# EAGLE board TwixBC (EAGLE 5.06)
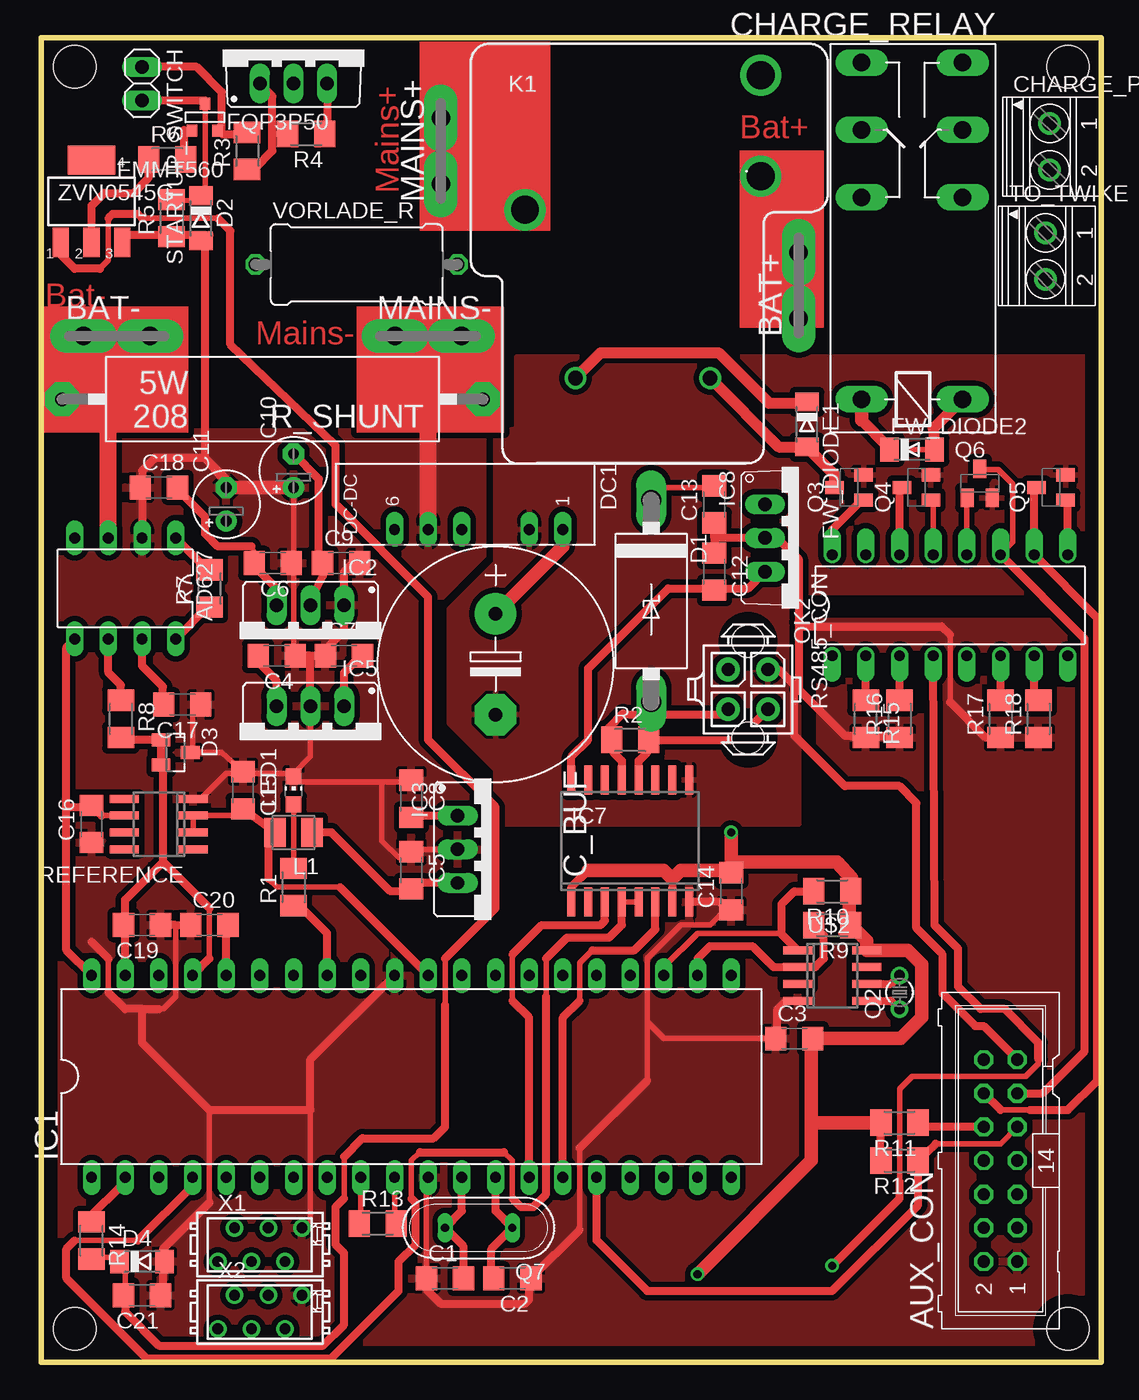
[diagram p0: board, top side]
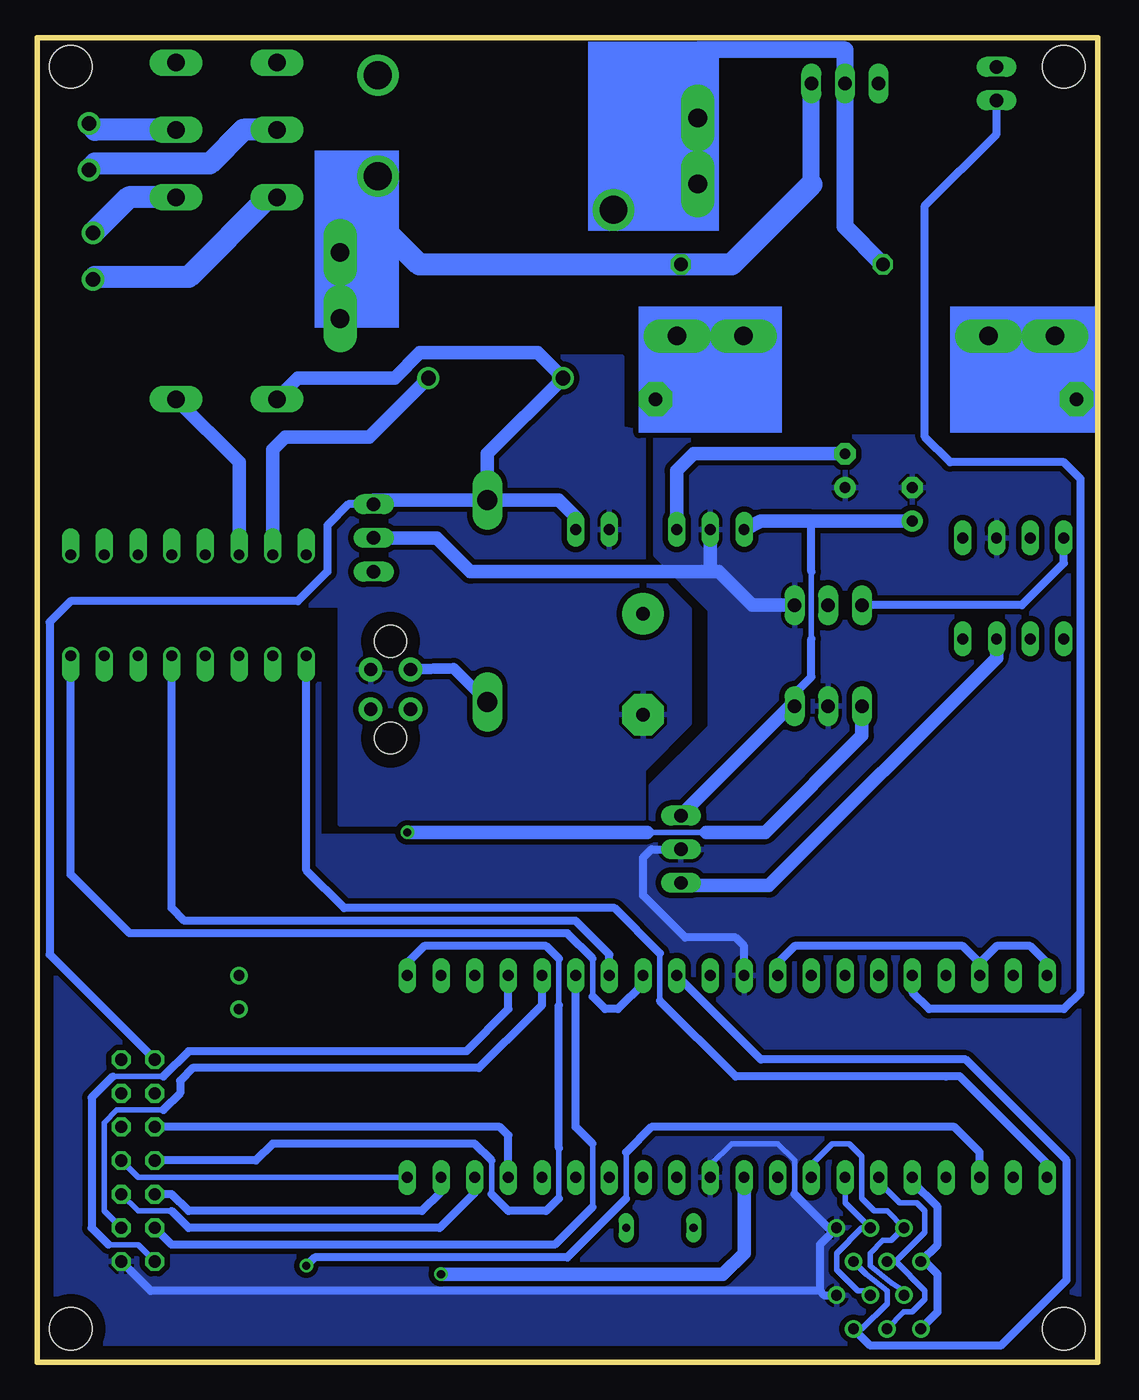
[diagram p1: board, bottom side, seen from below]

Size 80 x 100 mm. Coordinates in mm from the lower left corner, seen from the top.
Outline: 0,0 80,0 80,100 0,100 0,0
Copper layers (1*16): Top 0.035mm / dielectric 1.5mm / Bottom 0.035mm
Design rules "default *": minimum track width 10mil, minimum drill 24mil, track to track 16mil, track to pad 16mil, pad to pad 16mil, via to via 16mil, smd to smd 16mil, copper to edge 40mil, drill to drill 8mil, minimum pad ring 10mil, minimum via ring 8mil, stop-mask expansion 4mil, vias tented up to drill 0mil, thermal gap 10mil
Holes 3.2 mm at 2.54,2.54 2.54,97.79 77.47,97.79 77.47,2.54

## Footprints (pad centres in the part's own frame; a part is rotated, then mirrored left to right if it is on the bottom)
DIL08 = drill 0.813 long: 1 -3.81,-3.81; 2 -1.27,-3.81; 3 1.27,-3.81; 4 3.81,-3.81; 5 3.81,3.81; 6 1.27,3.81; 7 -1.27,3.81; 8 -3.81,3.81
ML14 = drill 0.914 octagon: 1 -7.62,-1.27; 2 -7.62,1.27; 3 -5.08,-1.27; 4 -5.08,1.27; 5 -2.54,-1.27; 6 -2.54,1.27; 7 0,-1.27; 8 0,1.27; 9 2.54,-1.27; 10 2.54,1.27; 11 5.08,-1.27; 12 5.08,1.27; 13 7.62,-1.27; 14 7.62,1.27
F061.100 = drill 1.4 pad 2.54 long: A1 -2.5,0; A2 2.5,0
C1206 = smd 1.6 x 1.8: 1 -1.4,0; 2 1.4,0
E2,5-5 = drill 0.813 pad 1.6 round: + -1.27,0 | drill 0.813 pad 1.6 octagon: - 1.27,0
E7,5-18 = drill 1.016 pad 3.15 round: + -3.81,0 | drill 1.016 pad 3.15 octagon: - 3.81,0
1751248 = drill 1.1 pad 1.7 round: 1 -1.75,-0.1; 2 1.75,-0.1
F4052 = drill 1.321 long: 1 -3.81,3.81; 2 -3.81,-3.81; O1 11.43,-3.81; O2 11.43,3.81; P1 16.51,-3.81; P2 16.51,3.81; S1 21.59,-3.81; S2 21.59,3.81
C4111-15 = drill 1.499 long: A 7.62,0; C -7.62,0
SOD80C = smd 1.4 x 1.8: A 1.7,0; C -1.7,0
SOT23 = smd 1 x 1.4: 1 -0.95,-1.1; 2 0.95,-1.1; 3 0,1.1
NMA = drill 0.813 long: 1 0,6.35; 2 0,3.81; 4 0,-1.27; 5 0,-3.81; 6 0,-6.35
SOT-23 = smd 0.787 x 0.889: 1 0.025,-1.016; 2 -0.94,1.016; 3 0.991,1.016
TO220BV = drill 1.016 long: D 0,-2.54; G -2.54,-2.54; S 2.54,-2.54
MINIMELF = smd 1.4 x 1.8: A 1.7,0; C -1.7,0
DIL40 = drill 0.813 long: 1 -24.13,-7.62; 2 -21.59,-7.62; 3 -19.05,-7.62; 4 -16.51,-7.62; 5 -13.97,-7.62; 6 -11.43,-7.62; 7 -8.89,-7.62; 8 -6.35,-7.62; 9 -3.81,-7.62; 10 -1.27,-7.62; 11 1.27,-7.62; 12 3.81,-7.62; 13 6.35,-7.62; 14 8.89,-7.62; 15 11.43,-7.62; 16 13.97,-7.62; 17 16.51,-7.62; 18 19.05,-7.62; 19 21.59,-7.62; 20 24.13,-7.62; 21 24.13,7.62; 22 21.59,7.62; 23 19.05,7.62; 24 16.51,7.62; 25 13.97,7.62; 26 11.43,7.62; 27 8.89,7.62; 28 6.35,7.62; 29 3.81,7.62; 30 1.27,7.62; 31 -1.27,7.62; 32 -3.81,7.62; 33 -6.35,7.62; 34 -8.89,7.62; 35 -11.43,7.62; 36 -13.97,7.62; 37 -16.51,7.62; 38 -19.05,7.62; 39 -21.59,7.62; 40 -24.13,7.62
79XXS = drill 1.016 long: GND -2.54,-2.54; IN 0,-2.54; OUT 2.54,-2.54
78XXS = drill 1.016 long: GND 0,-2.54; IN -2.54,-2.54; OUT 2.54,-2.54
SO16W = smd 0.6 x 2.2: 1 -4.445,-4.6; 2 -3.175,-4.6; 3 -1.905,-4.6; 4 -0.635,-4.6; 5 0.635,-4.6; 6 1.905,-4.6; 7 3.175,-4.6; 8 4.445,-4.6; 9 4.445,4.6; 10 3.175,4.6; 11 1.905,4.6; 12 0.635,4.6; 13 -0.635,4.6; 14 -1.905,4.6; 15 -3.175,4.6; 16 -4.445,4.6
TO220V = drill 1.016 long: 1 -2.54,-2.54; 2 0,-2.54; 3 2.54,-2.54
JT-PCB = drill 1.1 round: 1 5.08,0; 2 -5.08,0 | drill 2.1 round: C -8.89,12.7; NC 8.89,22.86; NO 8.89,15.24
L3225M = smd 1.6 x 2.2: 1 -1.4,0; 2 1.4,0
CHIP-LED0805 = smd 1.2 x 1.2: A 0,-1.05; C 0,1.05
DIL16 = drill 0.813 offset: 1 -8.89,-3.81; 2 -6.35,-3.81; 3 -3.81,-3.81; 4 -1.27,-3.81; 5 1.27,-3.81; 6 3.81,-3.81; 7 6.35,-3.81; 8 8.89,-3.81; 9 8.89,3.81; 10 6.35,3.81; 11 3.81,3.81; 12 1.27,3.81; 13 -1.27,3.81; 14 -3.81,3.81; 15 -6.35,3.81; 16 -8.89,3.81
TC26V = drill 0.813 round: 1 -1.27,0; 2 1.27,0
SOT23-BEC = smd 1 x 1.4: B -0.95,-1.1; C 0,1.1; E 0.95,-1.1
QS = drill 0.61 long: 1 -2.54,0; 2 2.54,0
M1206 = smd 1.6 x 2: 1 -1.4,0; 2 1.4,0
KH208-8 = drill 1.016 pad 2.54 octagon: 1 -15.875,0; 2 15.875,0
SO08 = smd 0.6 x 2.2: 1 -1.905,-2.6; 2 -0.635,-2.6; 3 0.635,-2.6; 4 1.905,-2.6; 5 1.905,2.6; 6 0.635,2.6; 7 -0.635,2.6; 8 -1.905,2.6
794681-4 = drill 1 pad 1.778 round: 1 1.5,-1.5; 2 1.5,1.5; 3 -1.5,-1.5; 4 -1.5,1.5 | hole 2.4: 3.63,0; -3.67,0
1X02 = drill 1.016 long: 1 -1.27,0; 2 1.27,0
S08 = smd 0.6 x 2.2: 1 0.635,1.21; 2 1.905,1.21; 3 3.175,1.21; 4 4.445,1.21; 5 4.445,6.41; 6 3.175,6.41; 7 1.905,6.41; 8 0.635,6.41
RDH/15 = drill 1.016 octagon: 1 -7.62,0; 2 7.62,0
MICROMATCH-6 = drill 0.813 round: 1 3.175,1.27; 2 1.905,-1.27; 3 0.635,1.27; 4 -0.635,-1.27; 5 -1.905,1.27; 6 -3.175,-1.27
SOT223 = smd 1.219 x 2.235: 1 -2.311,-3.099; 2 0,-3.099; 3 2.311,-3.099 | smd 3.6 x 2.2: 4 0,3.099

## Placement (x,y rotation side)
AD627  AD627  [DIL08]  6.35,58.42 180 top
AUX_CON  [ML14]  72.39,15.24 90 top
BAT+  PIN2F061.100  [F061.100]  57.15,81.28 90 top
BAT-  PIN2F061.100  [F061.100]  5.71,77.47 0 top
C1  18p  [C1206]  30.48,6.35 0 top
C2  18p  [C1206]  35.56,6.35 180 top
C3  100n  [C1206]  56.83,24.45 0 top
C4  100n  [C1206]  17.78,53.34 180 top
C5  100n  [C1206]  27.94,37.15 270 top
C6  100n  [C1206]  17.48,60.33 180 top
C7  100n  [C1206]  22.86,53.34 0 top
C8  100n  [C1206]  27.94,42.55 270 top
C9  100n  [C1206]  22.64,60.33 0 top
C10  10u  [E2,5-5]  19.05,67.31 90 top
C11  10u  [E2,5-5]  13.97,64.77 90 top
C12  100n  [C1206]  50.8,59.69 270 top
C13  100n  [C1206]  50.8,64.77 90 top
C14  100n  [C1206]  52.07,35.56 90 top
C15  100n  [C1206]  15.24,43.18 270 top
C16  100n  [C1206]  3.81,40.64 90 top
C17  100n  [C1206]  10.66,49.65 180 top
C18  100n  [C1206]  8.89,66.04 0 top
C19  100n  [C1206]  7.62,33.02 180 top
C20  100n  [C1206]  12.7,33.02 0 top
C21  100n  [C1206]  7.62,5.08 180 top
C_BUF  [E7,5-18]  34.29,52.7 270 top
CHARGE_PLUG  1751248  [1751248]  76.2,91.76 270 top
CHARGE_RELAY  4052  [F4052]  65.72,76.52 90 top
D1  1N5908  [C4111-15]  46.04,57.47 270 top
D2  [SOD80C]  12.06,86.36 270 top
D3  BAS40-06  [SOT23]  10.16,46.04 270 top
D4  [SOD80C]  7.62,7.62 0 top
DC1  12-12  [NMA]  33.02,62.87 270 top
FMMT560  [SOT-23]  12.38,93.98 180 top
FQP3P50  [TO220BV]  19.05,99.06 0 top
FW_DIODE1  [MINIMELF]  57.78,70.8 270 top
FW_DIODE2  [MINIMELF]  65.72,68.9 0 top
IC1  MEGA32-P  [DIL40]  27.94,21.59 0 top
IC2  TS7905  [79XXS]  20.32,54.61 180 top
IC3  TS7805  [78XXS]  33.97,38.73 270 top
IC5  TS7805  [78XXS]  20.32,46.99 180 top
IC7  ADM2483  [SO16W]  44.45,39.37 0 top
IC8  7805TV  [TO220V]  57.15,62.23 270 top
K1  JTN-PCB-DC12V  [JT-PCB]  45.4,74.3 0 top
L1  10uH  [L3225M]  19.05,40.01 180 top
LED1  [CHIP-LED0805]  19.05,43.18 0 top
MAINS+  PIN2F061.100  [F061.100]  30.16,91.44 90 top
MAINS-  PIN2F061.100  [F061.100]  29.21,77.47 0 top
OK2  ILQ1  [DIL16]  68.58,57.15 0 top
Q2  32678 kHz  [TC26V]  64.77,27.94 90 top
Q3  BC817-16SMD  [SOT23-BEC]  60.96,66.04 90 top
Q4  BC817-16SMD  [SOT23-BEC]  66.04,66.04 90 top
Q5  BC817-16SMD  [SOT23-BEC]  76.2,66.04 90 top
Q6  BC817-16SMD  [SOT23-BEC]  70.82,66.36 0 top
Q7  16MHz  [QS]  33.02,10.16 180 top
R1  390  [M1206]  19.05,35.88 90 top
R2  120  [M1206]  44.45,46.99 0 top
R3  1990k  [M1206]  15.56,91.44 90 top
R4  100k  [M1206]  20,92.71 180 top
R5  10k  [M1206]  9.84,86.36 90 top
R6  1M  [M1206]  9.53,90.81 0 top
R7  17k8  [M1206]  12.7,58.42 90 top
R8  10k  [M1206]  6.03,48.58 270 top
R9  10k  [M1206]  59.69,33.02 180 top
R10  10k  [M1206]  59.69,35.56 180 top
R11  10k  [M1206]  64.77,18.1 180 top
R12  10k  [M1206]  64.77,15.24 180 top
R13  10k  [M1206]  25.4,10.48 0 top
R14  100k  [M1206]  3.81,9.21 270 top
R15  390  [M1206]  62.23,48.58 270 top
R16  390  [M1206]  64.77,48.58 90 top
R17  390  [M1206]  72.39,48.58 90 top
R18  390  [M1206]  75.25,48.58 90 top
R_SHUNT  0.005  [KH208-8]  17.46,72.71 180 top
REFERENCE  REF192, ADR421  [SO08]  8.89,40.64 90 top
RS485_CON  794681-4  [794681-4]  53.34,50.8 90 top
STARTUP_SWITCH  [1X02]  7.62,96.52 270 top
TO_TWIKE  1751248  [1751248]  75.88,83.5 270 top
U$2  DS1629  [S08]  55.88,31.75 270 top
VORLADE_R  [RDH/15]  23.81,82.87 0 top
X1  MICROMATCH-6  [MICROMATCH-6]  16.51,8.89 0 top
X2  MICROMATCH-6  [MICROMATCH-6]  16.51,3.81 0 top
ZVN0545G  [SOT223]  3.81,87.63 0 top

## Library data of the parts
AD627 = analog-devices
AUX_CON = con-ml
BAT+ BAT- MAINS+ MAINS- = con-faston
C1-C21 C_BUF L1 R1-R18 VORLADE_R = rcl
CHARGE_PLUG TO_TWIKE = con-phoenix-350
CHARGE_RELAY K1 = relay
D1-D4 FW_DIODE1 FW_DIODE2 = diode
DC1 = dc-dc-converter
FMMT560 ZVN0545G = zetex
FQP3P50 = transistor-power
IC1 = atmel
IC2 IC3 IC5 = v-reg
IC7 REFERENCE = Libs_Markus
IC8 = linear
LED1 = led
OK2 = optocoupler
Q2 = crystal
Q3-Q6 = transistor-npn
Q7 = special
R_SHUNT = resistor-power
RS485_CON = con-amp
STARTUP_SWITCH = pinhead
U$2 = DS1629
X1 X2 = con-amp-micromatch

## Nets
ADC_HV: C20.2 D2.C FMMT560.1 IC1.36 R5.2 STARTUP_SWITCH.2
AUX: AUX_CON.12 OK2.10 Q5.C
AUX_EN: IC1.28 OK2.8
BAT_RELAY_EN: IC1.1 OK2.1
BUT_1: AUX_CON.9 IC1.16 R12.1
BUT_2: AUX_CON.10 IC1.17 R11.1
CHARGE_RELAY_EN: IC1.3 OK2.4
CS: IC1.5 X1.6 X2.6
DISP_DB4: AUX_CON.5 IC1.18
DISP_DB5: AUX_CON.6 IC1.19
DISP_DB6: AUX_CON.7 IC1.20
DISP_DB7: AUX_CON.8 IC1.21
DISP_EN_PWR: AUX_CON.4 IC1.26
DISP_RS: AUX_CON.2 IC1.24
DISP_RW: AUX_CON.3 IC1.25
GND: AD627.2 AUX_CON.1 C1.1 C2.1 C3.1 C4.1 C5.1 C6.1 C7.1 C8.1 C9.2 C10.+ C11.- C12.1 C13.1 C14.1 C15.1 C16.1 C17.1 C18.1 C19.1 C20.1 C21.1 D2.A D3.3 D4.A DC1.5 IC1.11 IC1.31 IC2.GND IC3.GND IC5.GND IC7.8 IC8.2 LED1.C MAINS-.A1 R5.1 R15.2 R16.1 R17.1 R18.1 R_SHUNT.1 REFERENCE.4 U$2.4 X1.1 X2.1 ZVN0545G.3
ISO_EN: IC1.29 X1.2 X2.2
MAINS+: FQP3P50.D K1.C MAINS+.A1 VORLADE_R.1
MISO: IC1.7 X1.3 X2.3
MOSI: IC1.6 X1.4 X2.4
N$1: IC1.33 R1.1
N$2: FMMT560.2 R3.2 STARTUP_SWITCH.1
N$3: FMMT560.3 R6.2
N$4: FQP3P50.G R3.1 R4.2
N$5: R6.1 ZVN0545G.2
N$6: AD627.6 R8.1
N$7: C19.2 D3.1 D3.2 IC1.37 IC1.39 R8.2
N$8: C21.2 D4.C R14.2 ZVN0545G.1
N$9: FW_DIODE1.A K1.1 OK2.15 Q3.C
N$10: OK2.13 Q4.B
N$11: OK2.2 R15.1
N$12: OK2.3 R16.2
N$13: OK2.6 R17.2
N$14: OK2.7 R18.2
N$18: C1.2 IC1.12 Q7.2
N$22: C2.2 IC1.13 Q7.1
N$24: BAT+.A1 BAT+.A2 FQP3P50.S K1.NO R4.1 VORLADE_R.2
N$26: IC7.12 R2.2 RS485_CON.3
N$27: IC7.13 R2.1 RS485_CON.4
N$28: C12.2 IC7.16 IC8.3
N$29: C15.2 IC1.30 L1.2 REFERENCE.2 REFERENCE.3
N$31: C7.2 C8.2 C11.+ DC1.6 IC3.IN IC5.IN
N$32: C9.1 C10.- DC1.4 IC2.IN
N$33: AD627.1 R7.2
N$34: AD627.8 R7.1
N$38: IC1.9 R13.1
N$40: Q2.2 U$2.6
N$41: Q2.1 U$2.5
N$42: OK2.16 Q3.B
N$45: CHARGE_PLUG.1 CHARGE_RELAY.P1
N$46: CHARGE_PLUG.2 CHARGE_RELAY.P2
N$47: CHARGE_RELAY.2 FW_DIODE2.A OK2.14 Q4.C
N$48: CHARGE_RELAY.O1 TO_TWIKE.1
N$49: CHARGE_RELAY.O2 TO_TWIKE.2
N$53: LED1.A R1.2
N$54: OK2.9 Q5.B
N$65: OK2.12 Q6.B
NOTAUS: AUX_CON.11 OK2.11 Q6.C
NOTAUS_EN: IC1.27 OK2.5
RS485_INPUT_DE: IC1.4 IC7.4 IC7.5
RXD: IC1.14 IC7.3
SCK: IC1.8 X1.5 X2.5
SCL: IC1.22 R9.2 U$2.2
SDA: IC1.23 R10.2 U$2.1
SOFT_SW_EN: IC1.2 R14.1
TWIKE_DCDC+: D1.A RS485_CON.2
TWIKE_DCDC-: AUX_CON.13 C_BUF.- DC1.2 IC7.9 Q3.E Q4.E Q5.E Q6.E RS485_CON.1
TWIKE_DCDC_BUF: AUX_CON.14 C13.2 C_BUF.+ CHARGE_RELAY.1 D1.C DC1.1 FW_DIODE1.C FW_DIODE2.C IC8.1 K1.2
TXD: IC1.15 IC7.6
U_REF: AD627.5 C16.2 IC1.32 IC1.38 IC1.40 REFERENCE.6
U_SHUNT: AD627.3 BAT-.A1 R_SHUNT.2
VCC: C3.2 C4.2 C14.2 IC1.10 IC5.OUT IC7.1 IC7.7 R9.1 R10.1 R11.2 R12.2 R13.2 U$2.8
VDD: AD627.7 C5.2 C17.2 IC3.OUT L1.1
VSS: AD627.4 C6.2 C18.2 IC2.OUT

## Tracks (layer width: path | path; a pad name or v marks a point on that pad's centre or on a via)
ADC_HV
  Top 0.406: 13.97,33.02 C20.2 | 12.38,87.63 12.7,87.63 R5.2 | 12.38,87.63 D2.C | 12.38,87.63 12.38,95.25 FMMT560.1
  Top 0.61: IC1.36 13.97,33.02 | STARTUP_SWITCH.2 12.38,95.25
  Bottom 0.61: IC1.36 13.97,27.94 12.7,26.67 2.54,26.67 1.27,27.94 1.27,66.67 2.54,67.94 11.11,67.94 13.02,69.85 13.02,87.31 7.62,92.71 STARTUP_SWITCH.2
AUX
  Top 0.406: 74.93,66.04 Q5.C | 72.39,19.05 74.61,19.05
  Top 0.61: 74.93,66.04 OK2.10 79.69,56.2 79.69,24.13 79.69,21.27 77.47,19.05 74.61,19.05 | 72.39,19.05 AUX_CON.12
AUX_EN
  Bottom 0.406: 38.1,27.62 38.1,30.48
  Bottom 0.61: IC1.28 34.29,28.57 36.2,26.67 37.15,26.67 38.1,27.62 | 38.1,30.48 40.01,32.38 73.03,32.38 77.47,36.83 OK2.8
BAT_RELAY_EN
  Bottom 0.406: 33.02,27.3 33.02,30.88
  Bottom 0.61: 33.02,30.88 36.43,34.29 56.83,34.29 59.69,37.15 OK2.1 | 33.02,27.3 27.3,21.59 11.43,21.59 10.4,21.6 3.81,15.01 IC1.1
BUT_1
  Top 0.406: AUX_CON.9 72.39,16.51 67.5,16.51
  Top 0.61: 67.5,16.51 R12.1 66.17,11.88 59.69,5.4 45.72,5.4 41.91,9.21 IC1.16
BUT_2
  Top 0.61: AUX_CON.10 66.67,17.78 R11.1
  Bottom 0.61: IC1.17 44.45,17.14 45.09,17.78 AUX_CON.10
CHARGE_RELAY_EN  (via drill 0.6, 0.61)
  Top 0.406: 75.25,22.86 75.25,22.54 74.3,21.59 65.72,21.59 64.77,20.64 64.77,13.65
  Top 0.61: OK2.4 67.41,33 69.2,31.21 69.2,28.36 70.89,26.67 72.71,26.67 75.25,24.13 75.25,22.86 | 64.77,13.65 64.77,12.38 v59.69,7.3
  Bottom 0.406: 35.56,15.88 35.56,12.38
  Bottom 0.61: IC1.3 8.89,15.88 10.79,17.78 33.66,17.78 35.56,15.88 | 35.56,12.38 40.01,7.94 59.05,7.94 v59.69,7.3
CS
  Bottom 0.406: 13.02,7.62 X1.6
  Bottom 0.61: IC1.5 13.97,13.65 12.06,11.75 12.06,8.89 X1.6 | 13.02,7.62 12.06,6.67 12.06,3.81 X2.6
DISP_DB4
  Bottom 0.406: 69.85,11.43 72.39,11.43 AUX_CON.5
  Bottom 0.61: IC1.18 47,12.8 49.64,10.16 68.58,10.16 69.85,11.43
DISP_DB5
  Bottom 0.61: IC1.19 49.6,12.8 50.97,11.43 68.58,11.43 69.85,12.7 AUX_CON.6
DISP_DB6
  Bottom 0.406: IC1.20 72.39,13.97 AUX_CON.7
DISP_DB7
  Bottom 0.406: 45.72,12.7 45.72,15.24 | 40.64,12.38 40.64,16.19 | 40.64,26.99 40.64,30.48
  Bottom 0.61: AUX_CON.8 63.5,15.24 62.23,16.51 46.99,16.51 45.72,15.24 | 45.72,12.7 44.45,11.43 41.59,11.43 40.64,12.38 | 40.64,16.19 40.64,26.99 | 40.64,30.48 41.59,31.43 50.8,31.43 52.07,30.16 IC1.21
DISP_EN_PWR
  Bottom 0.406: 38.1,11.75 38.1,16.51
  Bottom 0.61: IC1.26 39.37,17.78 38.1,16.51 | 38.1,11.75 40.96,8.89 69.85,8.89 AUX_CON.4
DISP_RS
  Bottom 0.406: 70.48,21.59 74.3,21.59 | 74.61,8.89 72.39,8.89 AUX_CON.2
  Bottom 0.61: IC1.24 44.45,26.67 47.62,23.5 68.58,23.5 70.48,21.59 | 74.3,21.59 75.88,20 75.88,10.16 74.61,8.89
DISP_RW
  Bottom 0.406: 70.48,19.05 73.98,19.05 74.93,18.1 74.93,11.43 AUX_CON.3
  Bottom 0.61: IC1.25 41.91,26.99 42.55,26.35 46.67,22.23 68.26,22.23 69.22,21.27 69.22,20.32 70.48,19.05
GND
  Top 0.406: 51.75,34.29 50.48,33.02 48.26,33.02 45.72,30.48 | 45.72,30.48 45.72,25.72 46.99,24.45 C3.1 55.56,24.58 | 51.59,34.45 50.48,34.92 | 51.75,34.29 51.59,34.45 | 51.75,34.29 52.07,34.29 C14.1 | C21.1 9.21,5.08 | C19.1 8.89,33.02 | C20.1 11.43,33.02 | 5.08,27.94 5.08,30.48 | 8.89,26.67 9.21,26.67 10.16,27.62 10.16,33.02 | 12.7,12.06 12.7,19.05 | 9.21,8.57 D4.A | 20.32,19.05 20.32,10.16 X1.1 | 6.35,85.09 ZVN0545G.3 | 12.7,85.09 R5.1 | C18.1 7.62,66.04 | 19.05,60.96 C10.+ | 12.38,85.09 D2.A | C12.1 50.8,60.96 | C13.1 50.8,63.5 | IC3.GND 27.62,38.73 | 11.43,46.04 11.43,49.85 C17.1 | 19.05,44.45 15.24,44.45 C15.1 | 25.72,43.81 19.37,43.81 LED1.C 19.05,44.45 | 25.72,43.81 27.94,43.81 C8.1 | 11.43,46.04 13.65,46.04 C15.1 | 11.43,46.04 D3.3 | 27.62,38.73 26.99,38.1 25.72,39.37 25.72,43.81 | 27.62,38.73 C5.1 | 24.13,60.96 C9.2 | C7.1 21.59,53.98 | 19.05,44.45 20.32,45.72 IC5.GND | 19.05,60.96 19.05,53.34 C4.1 | 19.05,60.96 C6.1 | REFERENCE.4 12.06,42.55 13.97,44.45 15.11,44.45 C15.1 | 56.2,27.3 U$2.4 | 51.59,34.45 51.27,34.77 | IC1.11 29.08,13.84 C1.1 29.08,5.53 | 36.83,6.22 C2.1 | 45.72,21.27 45.72,30.48 | 40.64,10.03 40.64,16.19 | R17.1 72.39,47.31 | IC8.2 55.56,62.23 | 64.64,47.31 R16.1 R15.2 | R15.2 61.09,47.18 60.96,47.31 | R15.2 61.73,47.18 61.59,47.31 | 26.99,77.79 MAINS-.A1 | 68.58,54.93 68.58,49.85
  Top 0.61: 9.21,5.08 9.21,8.57 12.7,12.06 | C20.1 10.16,33.02 C19.1 | 5.08,30.48 3.81,31.75 | 5.08,27.94 6.35,26.67 7.62,26.67 | 7.62,26.67 8.89,26.67 | 7.62,26.67 7.62,24.13 12.7,19.05 20.32,19.05 20.32,22.86 IC1.31 | 12.38,85.09 12.7,85.09 | 12.38,85.09 6.35,85.09 | 7.62,66.04 AD627.2 | 12.38,68.26 13.97,66.36 C11.- 13.97,66.67 12.38,68.26 | 12.38,68.26 12.38,85.09 | 50.8,62.23 C13.1 | 50.8,62.23 C12.1 | IC8.2 50.8,62.23 | 20.32,53.34 C7.1 | 20.32,53.34 C4.1 | IC5.GND 20.32,53.34 | 24.13,60.96 22.86,59.69 IC2.GND 22.86,55.24 21.59,53.98 | 56.2,27.3 55.56,26.67 55.56,24.58 | 51.27,34.77 IC7.8 | 29.08,5.53 30.16,4.45 36.51,4.45 36.83,4.76 36.83,6.22 | 40.64,16.19 45.72,21.27 | C2.1 40.64,10.03 | 55.56,62.23 57.15,60.64 57.15,55.88 | 57.15,55.88 57.15,50.8 60.64,47.31 60.96,47.31 61.59,47.31 64.64,47.31 | 12.38,68.26 8.57,68.26 7.62,67.31 7.62,66.17 C18.1 | R17.1 71.25,47.18 68.58,49.85 | 68.58,54.93 67.94,55.56 57.47,55.56 57.15,55.88
  Top 1.016: C10.+ C11.- | 29.21,77.47 26.99,77.79
  Top 1.27: DC1.5 29.21,77.47
  Bottom 0.406: IC1.11 29.2,14.9 27.59,16.51 24.13,16.51 22.86,15.24 22.86,12.7
  Bottom 0.61: 20.95,5.4 20.64,5.08 X2.1 | AUX_CON.1 71.44,5.4 20.95,5.4 | 22.86,12.7 20.32,10.16 X1.1 20.95,8.89 20.95,5.4 | IC1.31 26.67,31.43 27.3,32.07 31.11,32.07 34.29,35.24 34.29,38.1 33.66,38.73 IC3.GND
  Bottom 1.016: 29.21,59.69 28.57,59.69 26.04,57.15 IC2.GND | 29.21,59.69 DC1.5 | 29.21,59.69 47.31,59.69 49.85,62.23 IC8.2
  Bottom 1.778: 29.84,76.52 R_SHUNT.1 | 29.84,76.52 27.62,77.15 | MAINS-.A1 29.84,76.52
  pour Top: 80.01,55.88 58.74,55.88 58.74,39.69 33.66,39.69 33.66,43.81 29.21,47.62 29.21,56.83 33.34,60.96 33.34,70.17 0,70.17 0.32,0.64 -0.32,0 80.01,0
  pour Bottom: 80.01,56.52 58.74,56.52 58.74,39.69 33.66,39.69 33.66,43.5 29.21,47.94 29.21,56.83 33.34,60.96 33.34,69.85 0.32,69.85 0.32,0.64 -0.32,0 80.01,0
ISO_EN
  Bottom 0.406: X1.2 17.46,6.67 15.88,5.4 15.88,4.45 17.78,2.54 X2.2
  Bottom 0.61: IC1.29 25.4,22.86 9.96,22.86 2.34,15.24 2.34,6.23 7.3,1.27 17.14,1.27 X2.2
MAINS+
  Bottom 1.27: VORLADE_R.1 19.05,85.72 FQP3P50.D 19.05,99.06 30.2,99.06 MAINS+.A1
  Bottom 1.676: K1.C 32.11,87 MAINS+.A1
MISO
  Bottom 0.406: IC1.7 19.05,12.06 X1.3 17.78,10.16 19.68,8.26 19.68,6.99 18.1,5.4 17.46,5.4 X2.3
MOSI
  Bottom 0.406: IC1.6 16.51,13.65 14.92,12.06 13.65,12.06 13.02,11.43 13.02,9.84 15.24,7.62 | 15.24,7.62 X1.4 | 15.24,7.62 13.02,5.4 13.02,4.76 13.97,3.81 14.61,3.81 X2.4
N$1
  Top 0.406: 19.05,34.92 R1.1
  Top 0.61: 19.05,34.92 21.59,32.38 IC1.33
N$2
  Top 0.406: 16.19,92.71 R3.2 | FMMT560.2 13.65,92.71
  Top 0.61: 16.19,92.71 13.65,92.71 13.65,95.89 11.75,97.79 STARTUP_SWITCH.1
N$3
  Top 0.406: 10.79,93.03 FMMT560.3
  Top 0.61: 10.79,93.03 10.79,90.81 R6.2
N$4
  Top 0.406: R3.1 16.19,90.17 | 17.46,92.71 R4.2
  Top 0.61: 16.19,90.17 17.46,91.44 17.46,92.71 17.46,95.57 FQP3P50.G
N$5
  Top 0.61: R6.1 8.12,89.41 6.99,88.27 4.76,88.27 3.81,87.31 ZVN0545G.2
N$6
  Top 0.61: AD627.6 5.08,52.07 6.03,51.12 R8.1
N$7
  Top 0.406: 6.35,46.99 R8.2 | D3.1 8.89,46.99 | 12.7,34.29 12.7,30.48 | 6.35,33.02 C19.2
  Top 0.61: IC1.39 6.35,33.02 6.35,34.92 9.21,37.78 | 8.89,46.99 6.35,46.99 | 12.7,30.48 IC1.37 | 9.21,37.78 9.21,45.09 D3.2 D3.1 | 9.21,37.78 12.7,34.29
N$8
  Top 0.406: 6.35,7.94 3.81,7.94 R14.2 | 6.35,7.94 6.35,4.76 C21.2 | 6.35,7.94 D4.C | 4.45,82.55 5.08,83.19 5.08,86.36 | 13.34,86.36 7.62,86.36 | 30.48,26.99 30.48,30.48 | 22.86,12.38 22.86,15.54 | 1.27,83.82 ZVN0545G.1
  Top 0.61: 1.27,83.82 2.54,82.55 4.45,82.55 | 13.34,86.36 14.29,85.41 14.29,76.83 22.23,69.22 22.23,64.77 29.21,57.78 29.21,46.99 34.29,41.91 34.29,34.29 30.48,30.48 | 7.62,86.36 7.3,86.68 5.4,86.68 5.08,86.36 | 30.48,26.99 30.48,17.78 29.63,16.93 24.25,16.93 22.86,15.54 | 22.86,12.38 22.23,11.75 22.23,8.89 22.86,8.26 22.86,2.86 21.27,1.27 8.89,1.27 6.35,3.81 6.35,4.76
N$9
  Top 0.813: Q3.C 59.86,67.03 FW_DIODE1.A 55.67,69.1 K1.1
  Bottom 1.016: OK2.15 62.23,68.9 61.28,69.85 54.93,69.85 K1.1
N$10
  Top 0.406: OK2.13 67.31,64.77 Q4.B
N$11
  Top 0.61: R15.1 OK2.2
N$12
  Top 0.61: R16.2 OK2.3
N$13
  Top 0.61: R17.2 OK2.6
N$14
  Top 0.406: R18.2 74.93,50.3
  Top 0.61: 74.93,50.3 OK2.7
N$18
  Top 0.61: IC1.12 31.75,11.43 Q7.2 31.88,8.76 C1.2
N$22
  Top 0.406: C2.2 33.97,6.54
  Top 0.61: IC1.13 34.29,11.43 Q7.1 33.97,8.57 33.97,6.54
N$24
  Top 0.406: 21.59,92.71 R4.1
  Top 0.61: FQP3P50.S 21.59,92.71
  Bottom 1.27: 21.59,88.9 FQP3P50.S
  Bottom 1.676: 54.29,86 K1.NO | 54.29,86 BAT+.A2 | 21.59,88.9 27.62,82.87 VORLADE_R.2 51.16,82.87 54.29,86
  Bottom 1.778: BAT+.A2 BAT+.A1
N$26
  Top 0.406: 45.72,46.99 R2.2 45.72,46.86 45.72,46.04
  Top 0.61: IC7.12 45.09,45.4 45.72,46.04 | R2.2 52.53,46.99 RS485_CON.3
N$27
  Top 0.406: 43.18,46.04 43.18,46.86 R2.1 42.86,47.18 42.86,47.94
  Top 0.61: IC7.13 43.81,45.4 43.18,46.04 | RS485_CON.4 51.44,48.9 44.45,48.9 43.9,48.98 42.86,47.94
N$28
  Top 0.406: 51.44,58.42 50.8,58.42 C12.2
  Top 0.61: IC8.3 53.34,58.42 51.44,58.42 47.31,58.42 41.27,52.39 41.27,46.99 40.01,45.72 IC7.16
N$29
  Top 0.406: 15.24,41.91 C15.2 14.73,41.27 REFERENCE.3 REFERENCE.2 | 22.54,35.88 17.78,35.88 17.14,36.51 | L1.2 17.14,40.01
  Top 0.61: C15.2 L1.2 | 22.54,35.88 IC1.30 | 17.14,40.01 17.14,36.51
N$31
  Top 0.406: C8.2 27.94,41.27 | 24.13,53.34 C7.2
  Top 0.61: 27.94,41.27 IC3.IN | 24.13,53.34 22.86,52.07 IC5.IN
  Bottom 0.406: 21.59,54.61 21.59,59.69
  Bottom 0.61: 21.59,54.61 21.59,51.75 22.86,50.48 IC5.IN | 21.59,59.69 21.59,63.5
  Bottom 1.016: DC1.6 25.4,63.5 21.59,63.5 C11.+ | IC3.IN 23.18,49.53 IC5.IN
N$32
  Top 0.406: 20.95,60.64 21.27,59.37 C9.1
  Top 0.61: 21.27,59.37 20.32,57.47 IC2.IN | 20.95,60.64 20.95,66.67 C10.-
  Bottom 1.016: DC1.4 31.75,67.31 30.48,68.58 C10.-
N$33
  Top 0.406: R7.2 12.7,59.69
  Top 0.61: 12.7,59.69 AD627.1
N$34
  Top 0.406: 12.7,57.15 R7.1
  Top 0.61: AD627.8 12.7,57.15
N$38
  Top 0.406: IC1.9 24.13,10.48 R13.1
N$40
  Top 0.61: U$2.6 64.14,28.57 Q2.2
N$41
  Top 0.61: U$2.5 64.14,27.3 Q2.1
N$42
  Top 0.406: 61.91,65.09 Q3.B
  Top 0.61: 61.91,65.09 59.69,62.87 OK2.16
N$45
  Bottom 1.676: CHARGE_RELAY.P1 75.62,93.03 CHARGE_PLUG.1
N$46
  Bottom 1.676: CHARGE_RELAY.P2 64.45,93.03 66.99,90.49 75.62,90.49 CHARGE_PLUG.2
N$47
  Top 0.406: 64.77,66.04 Q4.C | FW_DIODE2.A 65.72,68.9
  Top 0.61: OK2.14 64.77,66.04
  Top 0.813: FW_DIODE2.A 67.31,70.48 CHARGE_RELAY.2
  Bottom 1.016: OK2.14 64.77,67.94 CHARGE_RELAY.2
N$48
  Bottom 1.676: CHARGE_RELAY.O1 73.09,87.95 TO_TWIKE.1
N$49
  Bottom 1.676: CHARGE_RELAY.O2 62.55,87.95 68.58,81.92 75.62,81.92 TO_TWIKE.2
N$53
  Top 0.406: LED1.A R1.2 19.05,39.37
N$54
  Top 0.406: 77.47,64.77 Q5.B
  Top 0.61: OK2.9 77.47,64.77
N$65
  Top 0.406: OK2.12 69.85,64.94 Q6.B
NOTAUS
  Top 0.406: Q6.C 70.7,67.5 70.8,67.4 72.2,67.4 73.32,66.28 73.32,61.93 OK2.11
  Top 0.61: AUX_CON.11 75.56,20.32 78.74,23.5 78.74,54.61 OK2.11
NOTAUS_EN
  Bottom 0.61: IC1.27 36.83,30.8 39.37,33.34 68.9,33.34 69.85,34.29 OK2.5
RS485_INPUT_DE
  Top 0.406: IC7.4 IC7.5 | 2.54,9.21 7.3,9.21 | 11.43,13.34 IC1.4 | 27.94,12.38 27.94,15.24 28.57,15.88 | 34.92,15.88 35.56,15.24 35.56,12.38 | 38.1,27.62 38.1,30.48
  Top 0.61: IC7.4 43.81,33.02 42.86,32.07 39.69,32.07 38.1,30.48 | 2.54,9.21 1.91,8.57 1.91,6.35 7.94,0.32 21.91,0.32 26.99,5.4 26.99,7.62 28.26,8.89 28.26,12.06 27.94,12.38 | 7.3,9.21 11.43,13.34 | 28.57,15.88 34.92,15.88 | 35.56,12.38 36.2,11.75 37.15,11.75 38.1,12.7 38.1,27.62
RXD
  Top 0.406: 35.56,27.3 35.56,30.8
  Top 0.61: IC1.14 36.83,26.04 35.56,27.3 | 35.56,30.8 37.78,33.02 42.23,33.02 42.55,33.34 IC7.3
SCK
  Bottom 0.406: IC1.8 21.59,14.92 20,16.51 18.73,16.51 17.78,15.56 17.78,12.38 16.83,11.43 15.88,11.43 X1.5 15.56,9.21 16.19,9.21 17.14,8.26 17.14,7.3 15.56,6.03 14.61,5.4 X2.5
SCL
  Top 0.406: 58.42,33.02 R9.2 59.05,32.26 | U$2.2 58.42,29.84
  Top 0.61: 58.42,29.84 59.05,30.48 59.05,32.26 | IC1.22 49.53,30.48 50.48,31.43 53.66,31.43 55.24,29.84 U$2.2
SDA
  Top 0.406: R10.2 58.42,35.56 | IC1.23 46.99,29.84 49.53,32.38 55.82,32.38 55.88,32.45
  Top 0.61: 55.82,32.38 U$2.1 | R10.2 56.83,35.56 55.88,34.61 55.88,32.45
SOFT_SW_EN
  Top 0.406: 3.17,11.11 3.49,10.79 3.49,10.48 R14.1 | 6.35,13.65 IC1.2
  Top 0.61: 3.49,10.79 6.35,13.65
TWIKE_DCDC+
  Bottom 0.813: D1.A 48.58,52.39 RS485_CON.2
TWIKE_DCDC-
  Top 0.61: RS485_CON.1 55.65,52.3 56.83,51.12 56.83,47.31 60.64,43.5 64.77,43.5 66.04,42.23 66.04,32.78 68.03,30.8 68.03,27.84 70.47,25.4 71.12,25.4 AUX_CON.13
  pour Top: 35.88,70.48 34.29,70.17 34.29,60.33 30.8,56.83 30.8,48.26 34.29,44.77 34.29,40.64 57.15,40.64 57.15,58.1 80.01,58.1 80.01,75.88 35.88,75.88
  pour Bottom: 35.88,75.88 35.88,70.48 34.29,70.17 34.29,60.33 30.8,56.83 30.8,48.26 34.29,44.77 34.29,40.64 57.15,40.64 57.15,57.15 80.01,57.15 80.01,75.88
TWIKE_DCDC_BUF
  Top 0.406: FW_DIODE2.C 63.82,68.9 | D1.C 46.99,66.04 50.8,66.04 C13.2
  Top 0.61: 63.82,69.22 FW_DIODE2.C | 57.67,72.39 FW_DIODE1.C
  Top 0.813: 61.91,71.12 63.82,69.22 | K1.2 42.23,76.2 51.12,76.2 54.93,72.39 57.67,72.39
  Top 1.016: CHARGE_RELAY.1 61.91,71.12 | C_BUF.+ 39.37,61.59 DC1.1
  Bottom 0.61: 54.61,65.09 IC8.1 56.52,64.77 58.1,63.18 58.1,59.69 60.33,57.47 77.47,57.47 79.06,55.88 79.06,30.8 AUX_CON.14
  Bottom 1.016: DC1.1 39.37,63.82 40.64,65.09 D1.C | D1.C 54.61,65.09 | D1.C 46.04,68.58 K1.2 42.23,76.2 51.12,76.2 53.02,74.3 60.33,74.3 CHARGE_RELAY.1
TXD
  Top 0.406: 40.64,27.3 40.64,30.16 41.59,31.11
  Top 0.61: IC1.15 39.37,26.04 40.64,27.3 | 41.59,31.11 44.77,31.11 46.35,32.7 IC7.6
U_REF
  Top 0.406: 3.81,41.91 C16.2 | 4.58,41.27 REFERENCE.6
  Top 0.61: 1.91,41.91 3.81,41.91 | 1.91,41.91 1.91,53.98 AD627.5 | IC1.40 1.91,31.11 1.91,41.91 | C16.2 4.58,41.27
  Bottom 0.61: 8.89,30.16 10.16,31.43 22.86,31.43 24.13,30.16 IC1.32 | 8.89,30.16 7.62,31.43 5.08,31.43 3.81,30.16 IC1.40 | 8.89,30.16 IC1.38
U_SHUNT
  Top 0.406: 5.08,72.71 R_SHUNT.2
  Top 1.27: AD627.3 5.08,72.71
  Bottom 1.778: R_SHUNT.2 6.99,78.06 BAT-.A1
VCC  (via drill 0.61)
  Top 0.406: 16.51,52.74 C4.2 | IC1.10 26.67,11.43 26.35,10.16 R13.2 | 60.33,32.38 60.96,33.02 R9.1 | 58.1,24.45 C3.2 | 60.96,35.56 R10.1 | 40.01,35.88 IC7.1 | C14.2 52.07,37.77 51.75,37.15 | 63.05,18.1 R11.2 | 63.24,15.11 R12.2
  Top 0.61: 16.51,52.74 17.78,51.47 IC5.OUT | 60.96,35.56 61.16,36.53 | 47.62,36.51 IC7.7 | 41.27,37.15 40.01,35.88 | R11.2 63.24,15.11
  Top 1.016: 61.16,36.53 60.02,37.77 52.07,37.77 v52.07,40.01 | 58.1,18.1 58.1,24.45 64.87,24.45 66.46,26.04 66.46,30.06 65.41,31.11 U$2.8 62.29,31.82 R9.1 | v49.53,6.67 58.1,15.24 58.1,18.1 | 60.96,33.02 60.96,35.56 | 41.27,37.15 46.99,37.15 47.62,36.51 48.26,37.15 51.75,37.15 | 58.1,18.1 63.05,18.1
  Bottom 0.406: 33.97,40.01 29.53,40.01
  Bottom 1.016: IC1.10 26.67,8.26 28.26,6.67 v49.53,6.67 | IC5.OUT 17.78,47.31 25.08,40.01 29.53,40.01 | v52.07,40.01 33.97,40.01
VDD
  Top 0.406: 27.94,36.2 C5.2 27.81,35.56
  Top 0.61: IC3.OUT 27.94,36.2 | L1.1 21.91,40.01 26.35,35.56 27.81,35.56 | C17.2 9.2,49.71 9.2,51 7.62,52.58 AD627.7
  Bottom 1.016: AD627.7 7.62,53.18 24.8,36 31.24,36 IC3.OUT
VSS
  Top 0.406: 16.51,59.69 16.51,60.96 C6.2 | 16.19,60.96 15.88,61.59 | 10.16,66.04 C18.2
  Top 0.61: 16.51,59.69 17.78,58.42 IC2.OUT | 10.16,66.04 12.38,63.82 12.38,62.55 13.34,61.59 15.88,61.59 | C6.2 16.19,60.96
  Bottom 0.61: AD627.4 2.54,60.33 5.71,57.15 IC2.OUT
(copper drawn outside any net)
  shapes: Bottom area x4, Top area x4

## Text on the board
Top: Bat+ | Mains+ | Bat- | Mains-